# EAGLE board G1-ATA_connector_on_bottom (EAGLE 9.6.2)
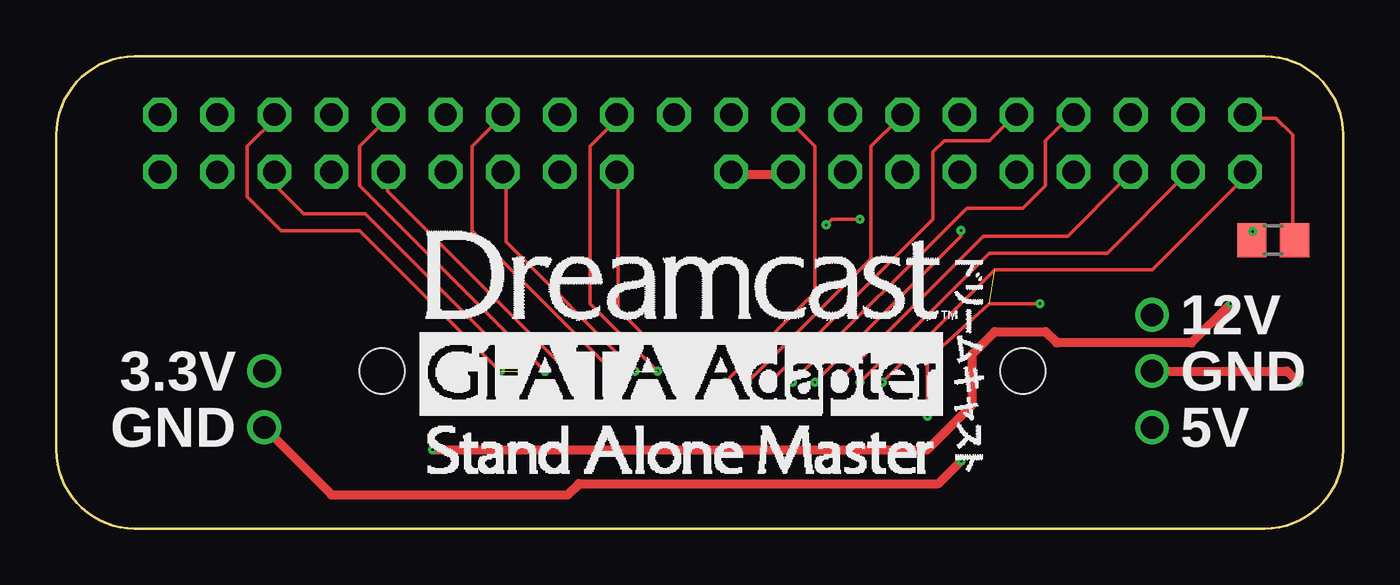
[diagram p0: board, top side]
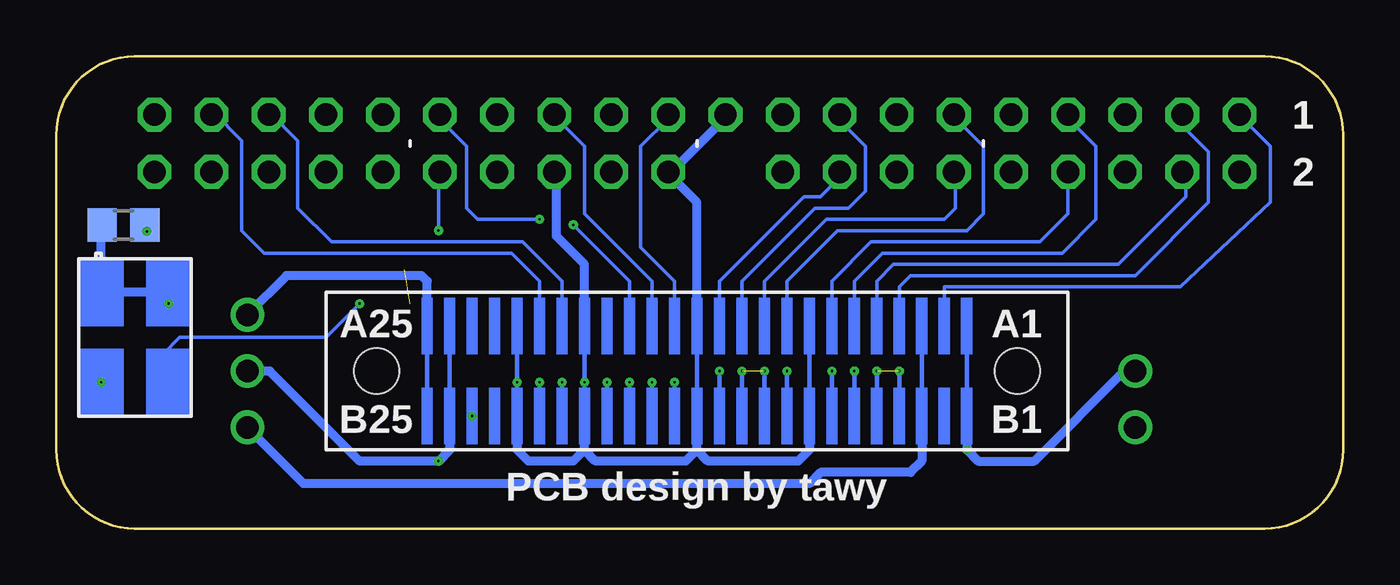
[diagram p1: board, bottom side, seen from below]

Size 57.25 x 21 mm. Coordinates in mm from the lower left corner, seen from the top.
Outline: 3.5,21 53.75,21 arc-90 57.25,17.5 57.25,3.5 arc-90 53.75,0 3.5,0 arc-90 0,3.5 0,17.5 arc-90 3.5,21
Copper layers (1*16): Top 0.035mm / dielectric 1.6mm / Bottom 0.035mm
Design rules "Elecrow_2-layer_PCB_eagle_rule *": minimum track width 6mil, minimum drill 12mil, track to track 6mil, track to pad 8mil, pad to pad 12mil, via to via 12mil, smd to smd 0mil, copper to edge 20mil, drill to drill 10mil, minimum pad ring 6mil, minimum via ring 6mil, stop-mask expansion 100mil, vias tented up to drill 10mil, thermal gap 10mil
Net classes: 0 Digital: width 0.305 mm; 2 Clock/HS: width 0.305 mm; 3 Power: width 0.61 mm; 4 USB: width 0.305 mm, clearance 0.508 mm to class 0, clearance 0.508 mm to class 1, clearance 1.27 mm to class 2, clearance 0.508 mm to class 3
Holes 2 mm at 14.5,7 43,7

## Footprints (pad centres in the part's own frame; a part is rotated, then mirrored left to right if it is on the bottom)
R0805 = smd 1.3 x 1.5: 1 -0.95,0; 2 0.95,0

## Placement (x,y rotation side)
1K1  [R0805]  54.25,13.5 0 bottom
1K3  [R0805]  54.13,12.82 0 top

## Library data of the parts
1K1 1K3 = resistor

## Tracks (layer width: path | path; a pad name or v marks a point on that pad's centre or on a via)
3.3V  (via drill 0.1)
  Top 0.406: v16.75,3.5 38.75,3.5 40.75,5.5 40.75,7.75 41.75,8.75 44,8.75 44.5,8.25 50.5,8.25 v52.25,10
  Bottom 0.406: 16.75,4.25 v16.75,3.5 16.25,3 13.75,3 9.75,7 | v52.25,10 52.75,10.5 55.25,10.5 55.25,13.5
5V  (via drill 1)
  Bottom 0.406: v48.75,4.5 46.25,2 23.75,2 23.25,2.5 19.25,2.5 18.75,3 18.75,4
PW_GND  (via drill 0.1, 1)
  Top 0.406: v40.25,3 39.25,2 23.25,2 22.75,1.5 12.25,1.5 v9.25,4.5 | v48.75,7 54.75,7 v55.25,6.5
  Bottom 0.406: v48.75,7 47.75,7 43.75,3 v40.25,3 39.75,3.5 39.75,4
S$1  (via drill 0.1)  (1 unrouted)
  Top 0.152: v19.75,7 13.5,13.25 10,13.25 8.5,14.75 8.5,17 9.75,18.25
  Bottom 0.203: v19.75,7 19.75,5.5 | 20.75,7 20.75,5.5
S$2  (via drill 1 pad 1.3)
  other vias: 52.88,18.4
S$3
  Bottom 0.152: 53.25,14 53.25,13.5
S$4  (via drill 1)
  Bottom 0.406: v9.25,7 9.75,7
S$5  (via drill 1 pad 1.3)
  other vias: 50.34,18.4
S$6
  Bottom 0.406: 36.75,4.25 36.75,3.5 36.25,3 34.25,3 33.75,3.5 | 33.75,3.5 33.75,4.25 | 33.75,3.5 33.25,3 29.25,3 28.75,3.5 | 28.75,3.5 28.75,4.25 | 28.75,3.5 28.25,3 24.25,3 23.75,3.5 23.75,4
S$7  (via drill 0.1)
  other vias: 53.22,13.21
S$9  (via drill 1 pad 1.3)
  other vias: 47.8,18.4
S$10
  Top 0.152: 53,18.25 54.25,18.25 55,17.5 55,13
S$11  (via drill 1 pad 1.3)
  other vias: 45.26,18.4
S$15  (via drill 1 pad 1.3)
  other vias: 42.72,18.4
S$16  (via drill 1 pad 1.3)
  other vias: 40.18,18.4
S$17  (via drill 1 pad 1.3)
  other vias: 37.64,18.4
S$19  (via drill 1 pad 1.3)
  other vias: 35.1,18.4
S$21  (via drill 1 pad 1.3)
  other vias: 32.56,18.4
S$22  (via drill 1 pad 1.3)
  other vias: 30.02,18.4
S$25  (via drill 1 pad 1.3)
  other vias: 27.48,18.4
S$29  (via drill 1 pad 1.3)
  other vias: 24.94,18.4
S$33  (via drill 1 pad 1.3)
  other vias: 22.4,18.4
S$34  (via drill 1 pad 1.3)
  other vias: 19.86,18.4
S$42  (via drill 1 pad 1.3)
  other vias: 17.32,18.4
S$44  (via drill 1 pad 1.3)
  other vias: 14.78,18.4
S$45  (via drill 1 pad 1.3)
  other vias: 12.24,18.4
S$49  (via drill 1 pad 1.3)
  other vias: 9.7,18.4
S$54  (via drill 1 pad 1.3)
  other vias: 7.16,18.4
S$55  (via drill 1 pad 1.3)
  other vias: 4.62,18.4
S$64  (via drill 1 pad 1.3)
  other vias: 52.88,15.86
S$67  (via drill 1 pad 1.3)
  other vias: 50.34,15.86
S$69  (via drill 1 pad 1.3)
  other vias: 47.8,15.86
S$81  (via drill 1 pad 1.3)
  other vias: 45.26,15.86
S$82  (via drill 1 pad 1.3)
  other vias: 42.72,15.86
S$85  (via drill 1 pad 1.3)
  other vias: 40.18,15.86
S$90  (via drill 1 pad 1.3)
  other vias: 37.64,15.86
S$91  (via drill 1 pad 1.3)
  other vias: 35.1,15.86
S$96  (via drill 1 pad 1.3)
  other vias: 32.56,15.86
S$100  (via drill 1 pad 1.3)
  other vias: 30.02,15.86
S$101  (via drill 0.1)
  Top 0.152: v31.75,6.5 39,13.75 39,16.75 39.5,17.25 41.5,17.25 42.5,18.25
  Bottom 0.203: v31.75,6.5 31.75,5.5
S$103  (via drill 1 pad 1.3)
  other vias: 24.94,15.86
S$105  (via drill 1 pad 1.3)
  other vias: 22.4,15.86
S$106  (via drill 1 pad 1.3)
  other vias: 19.86,15.86
S$107  (via drill 1 pad 1.3)
  other vias: 17.32,15.86
S$108  (via drill 1 pad 1.3)
  other vias: 14.78,15.86
S$109  (via drill 1 pad 1.3)
  other vias: 12.24,15.86
S$110  (via drill 1 pad 1.3)
  other vias: 9.7,15.86
S$111  (via drill 1 pad 1.3)
  other vias: 7.16,15.86
S$114  (via drill 1 pad 1.3)
  other vias: 4.62,15.86
S$118
  Bottom 0.152: 7.25,18.25 7.25,18 6,16.75 6,14.5 9.25,11.25 19.25,11.25 19.75,10.75 19.75,10
S$120  (via drill 0.1)
  Top 0.152: 20,15.75 20,12.75 v25.75,7
S$122
  Bottom 0.152: 4.5,18.25 3.25,17 3.25,14.5 7.25,10.75 17.75,10.75 17.75,10
S$123
  Bottom 0.152: 7,15.75 7,14.75 10,11.75 20,11.75 20.75,11 20.75,10.25
S$124
  Bottom 0.203: 23.75,5.5 23.75,8.75
S$125
  Bottom 0.152: 12.25,18.25 11,17 11,13.75 12.5,12.25 20.5,12.25 21.75,11 21.75,10
S$126
  Bottom 0.152: 17.25,15.75 17.25,14.25 17.75,13.75 23,13.75 25.75,11 25.75,10
S$130  (via drill 0.1)
  Top 0.152: 19.75,18.25 18.5,17 18.5,13.25 v24.75,7
  Bottom 0.203: v24.75,7 24.75,5.5
S$131  (via drill 0.1)  (1 unrouted)
  Top 0.152: 25,18.25 23.75,17 23.75,10 v26.75,7
  Bottom 0.203: v26.75,7 26.75,5.25 | 25.75,7 25.75,5.25
S$132  (via drill 0.1)
  Top 0.152: v27.75,7 25,9.75 25,15.5
  Bottom 0.203: v27.75,7 27.75,5.5
S$133  (via drill 0.1)
  Top 0.152: 32.75,18.25 32.5,18.25 33.75,17 33.75,10.5 v29.75,6.5
  Bottom 0.203: v29.75,6.5 29.75,5.75
S$135  (via drill 0.1)
  Top 0.152: 37.75,18.25 37.5,18.25 36.25,17 36.25,12 v30.75,6.5
  Bottom 0.203: v30.75,6.5 30.75,5.5
S$137
  Bottom 0.406: 40.75,10 40.75,11 41,11.25 47,11.25 48.75,9.5
S$138  (via drill 0.1)
  Top 0.152: v32.75,6.5 40.5,14.25 43,14.25 44,15.25 44,17.25 45,18.25
  Bottom 0.203: v32.75,6.5 32.75,5.75
S$142  (via drill 0.1)
  Top 0.152: 47.5,15.5 45,13 41.25,13 v34.75,6.5
  Bottom 0.203: v34.75,6.5 34.75,5.75
S$143  (via drill 0.1)
  Top 0.152: v35.75,6.5 41.5,12.25 46.75,12.25 50.25,15.75
  Bottom 0.203: v35.75,6.5 35.75,5.75
S$144
  Top 0.406: 30,15.75 32.5,15.75
S$145
  Bottom 0.406: 27.5,18.25 30,15.75 28.75,14.5 28.75,9.5
S$146
  Bottom 0.152: 12.25,15.75 12.25,14 13.5,12.75 21,12.75 22.75,11 22.75,10
S$147  (via drill 0.1)
  Top 0.152: v22.75,7 14.75,15 14.75,15.5
  Bottom 0.203: v22.75,7 22.75,5.75
S$148
  Bottom 0.203: 19.75,8 19.75,8.75
S$149
  Bottom 0.152: 22.5,18.25 21.25,17 21.25,15 22,14.25 23.5,14.25 26.75,11 26.75,9.75
S$150
  Bottom 0.152: 17.25,18.25 16,17 16,14 16.75,13.25 22.5,13.25 24.75,11 24.75,10
S$151
  Bottom 0.152: 27.75,10 27.75,11 24,14.75 23.25,14.75 22.5,15.5
S$152
  Bottom 0.152: 30,18.25 31.25,17 31.25,12.5 29.75,11 29.75,10
S$153
  Bottom 0.406: 33.75,10 33.75,11.75 35,13 35,15.75
S$156
  Bottom 0.152: 35,18.25 33.75,17 33.75,14 30.75,11 30.75,9.75
S$157  (via drill 0.1)
  Top 0.152: v34.25,13.5 34.5,13.75 v35.75,13.75
  Bottom 0.152: v34.25,13.5 31.75,11 31.75,10 | 40.25,18.25 39,17 39,14.25 38.5,13.75 v35.75,13.75
S$158  (via drill 0.1)
  Top 0.152: 9.75,15.75 9.75,15.25 11,14 13.75,14 v20.75,7
S$159  (via drill 0.1)
  Top 0.152: 14.75,18.25 13.5,17 13.5,15.25 v21.75,7
  Bottom 0.203: v21.75,7 21.75,5.75
S$163  (via drill 1)
  other vias: 48.75,9.5
S$164
  Bottom 0.152: 47.75,18.5 46.5,17.25 46.5,14.25 45,12.75 36.5,12.75 34.75,11 34.75,10
S$173
  Bottom 0.203: 16.75,6 16.75,8.25
S$174
  Bottom 0.203: 18.75,6 18.75,8.25
S$177
  Bottom 0.203: 28.75,5.5 28.75,8.5
S$178  (via drill 0.1)
  Top 0.152: v33.75,6.5 40.25,13 v40.25,13.25
  Bottom 0.152: v40.25,13.25 40.25,15.5
  Bottom 0.203: 33.75,5.75 v33.75,6.5 33.75,8.25
S$179  (via drill 0.1)  (1 unrouted)
  Top 0.152: v36.75,6.5 41.75,11.5 48.75,11.5 53,15.75 | v38.75,5 38.75,7.5 41.5,10 v43.75,10
  Bottom 0.152: v43.75,10 45.25,8.5 51.75,8.5 52.5,7.75
  Bottom 0.203: 36.75,5.75 v36.75,6.5 36.75,8
S$180
  Bottom 0.203: 39.75,8.25 39.75,5.75
S$181
  Bottom 0.203: 40.75,8.25 40.75,5.75
S$182
  Bottom 0.152: 50.25,18.5 49,17.25 49,13.25 48,12.25 37,12.25 35.75,11 35.75,10
(copper drawn outside any net)
  shapes: Bottom area x54

## Text on the board
tNames: 12V | 3.3V | GND | GND | 5V
bNames: 1 | 2 | A1 | A25 | B1 | B25 | PCB design by tawy